# Altium PCB Jukebox PCB.PCBDOC (part 3 of 3)
Units mil, origin at the board's own origin, x right, y up, seen from the top; angles counter-clockwise.
Board outline 8310.03 x 5810.03 mil, 2 copper layers (Top Layer, Bottom Layer); 153 components, 235 nets, 1170 pads, 408 vias.
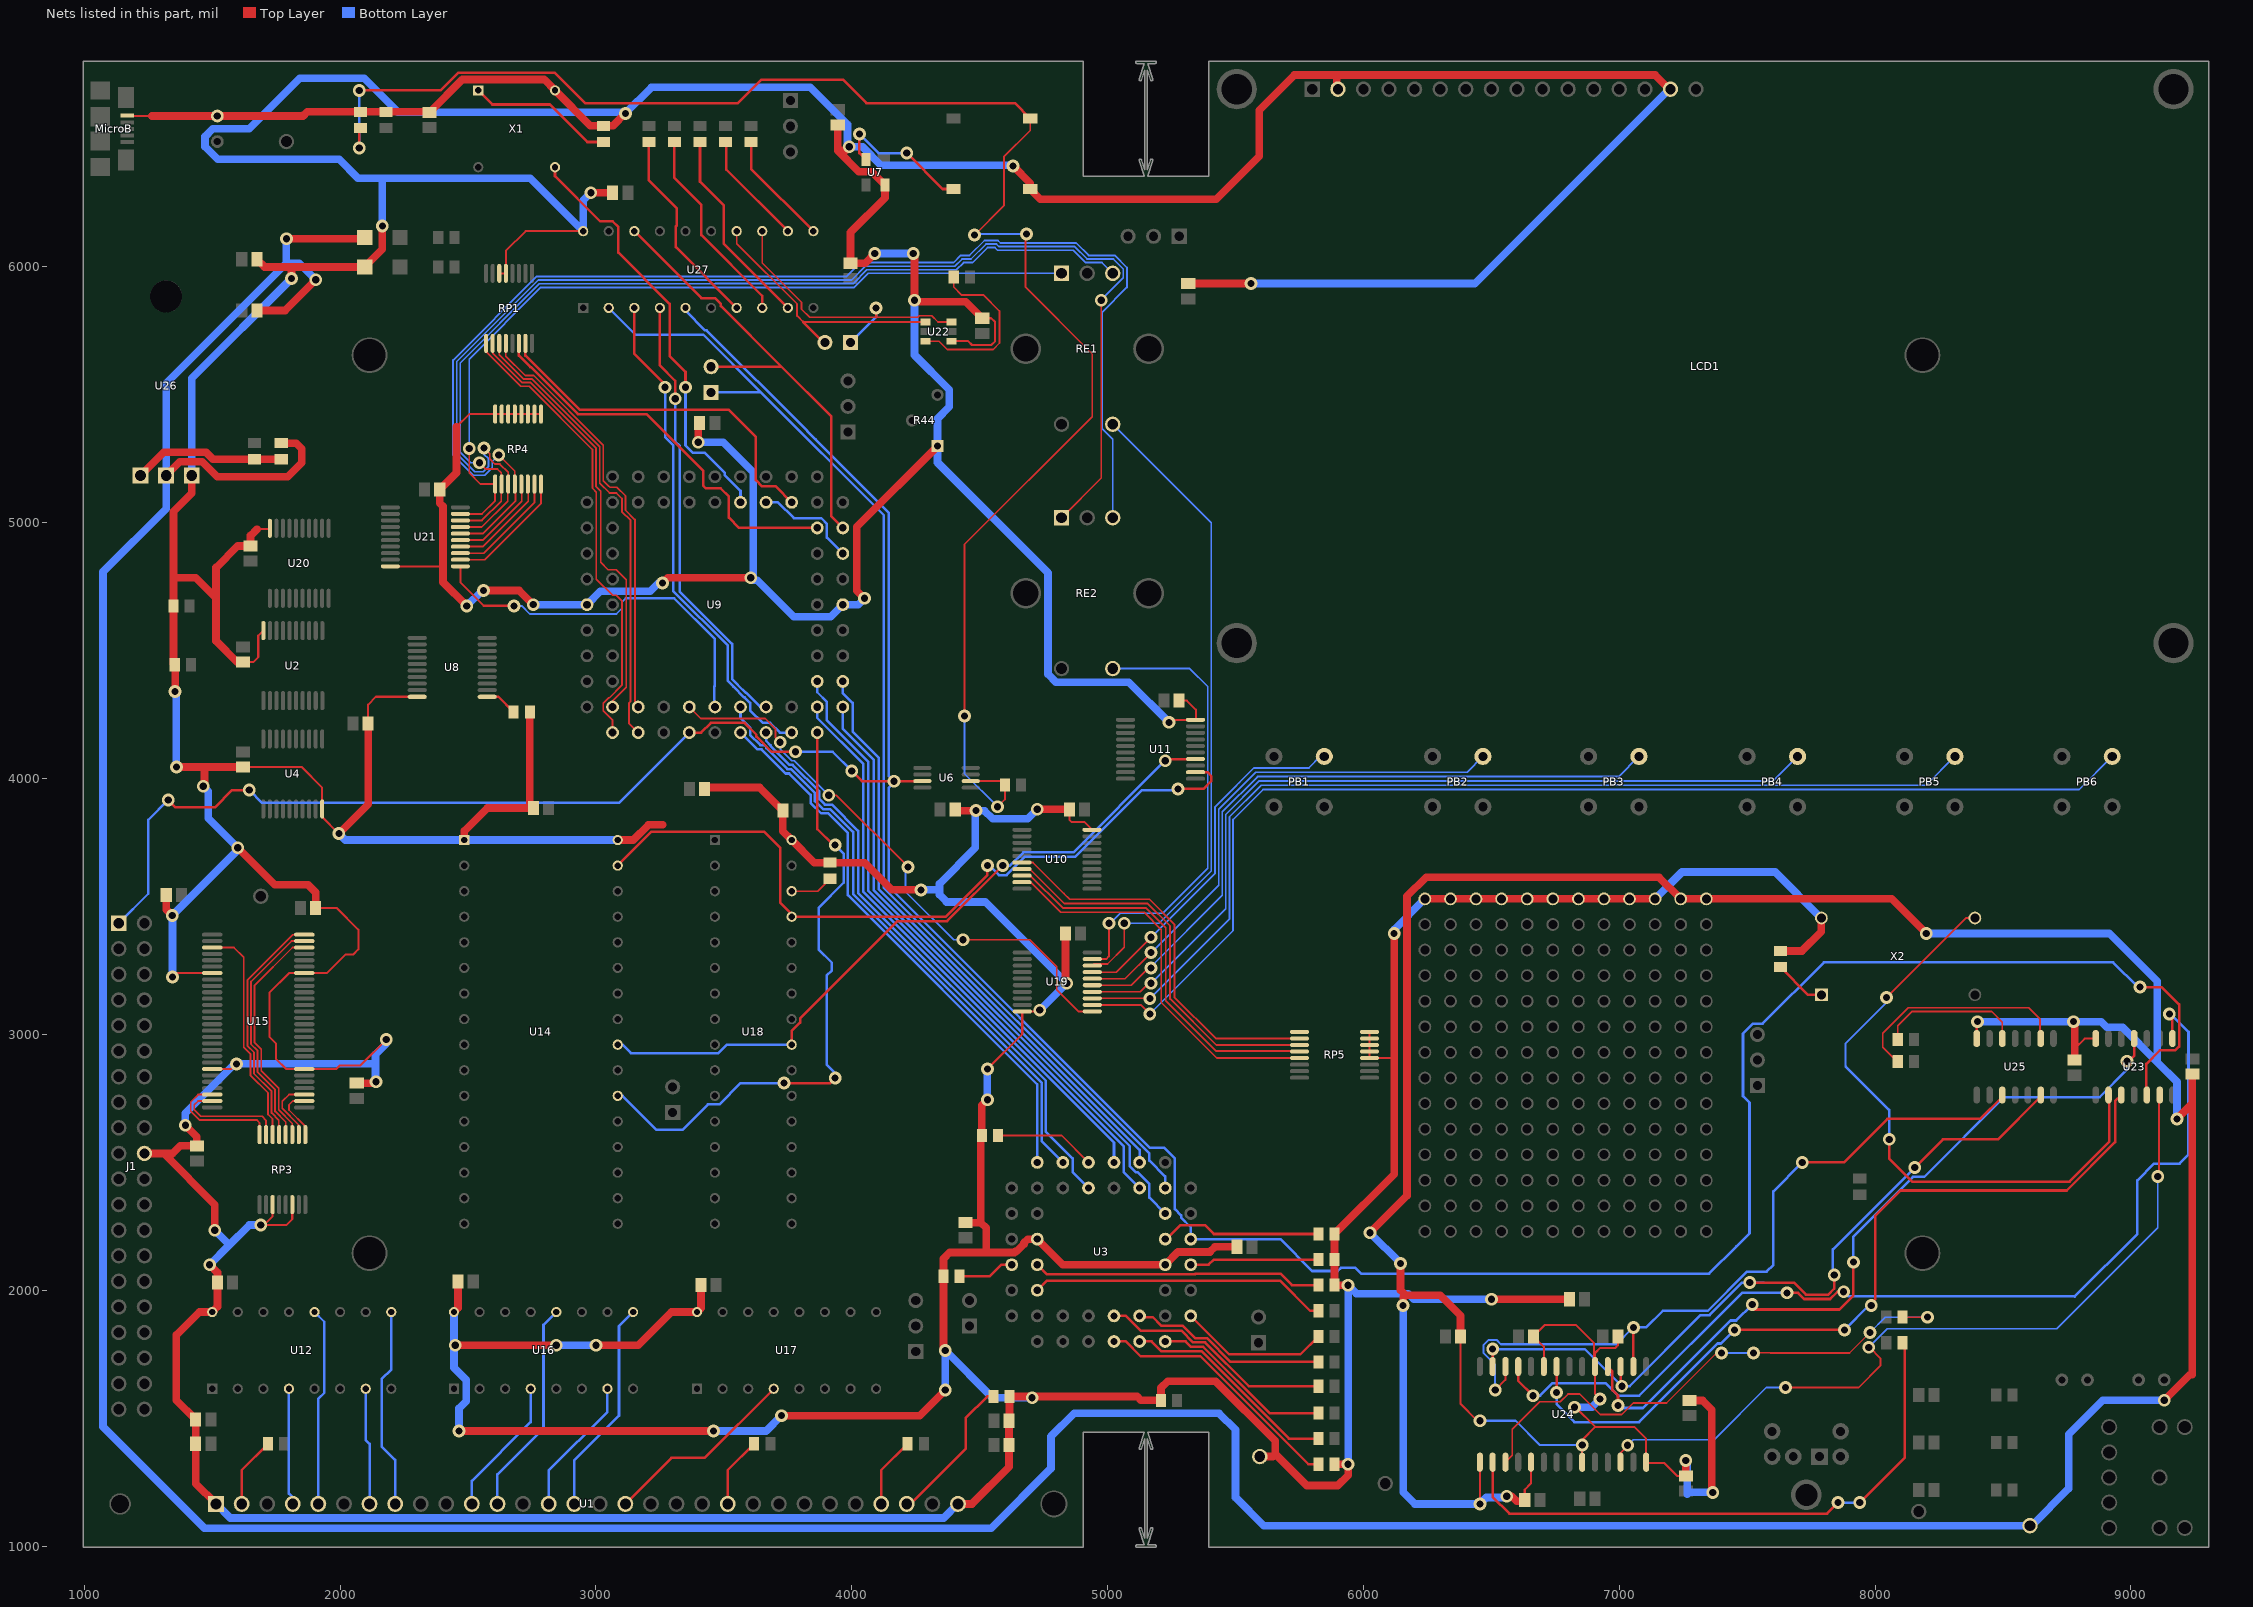
[diagram p3: the nets of this part, all layers, seen from the top]

## Via types
v1: diameter 50, hole 28, Top Layer to Bottom Layer, 408 vias

## Nets (pads, with @x,y where several pads share a name; then routed paths per layer and width w, separated by ;. In a path a pad name is that pad's centre, name@x,y a point inside that pad or via, vN(x,y) a via of type N, cw(c..) or ccw(c..) an arc to the next point about the centre after c; other vN are vias at no path point) (continued)
NetP9_1: P9.1 U3.41 U27.2 | length 4691.1
  Bottom Layer w10: U27.2@3050,5840 3155,5735 3420,5735 3645,5510 ; P9.1@3450,5510 3645,5510 ; U3.41@5225,2400 5225,2444.85 5162.9,2506.95 5162.9,2535.39 4125,3573.29 4125,5030 3645,5510
NetPB1_2: PB1.2 U19.7 | length 1408.6
  Top Layer w7: U19.7@4940,3243.54 5033.54,3243.54 v1(5170,3380)
  Bottom Layer w7: v1(5170,3380) 5420,3630 5420,3890 5494.5,3964.5 5494.7,3964.5 5515.5,3985.3 5515.5,3985.5 5571.99,4041.99 5786.99,4041.99 5831.85,4086.85 PB1.2@5846.85,4086.85
NetPB2_2: PB2.2 U19.6 | length 2060.1
  Top Layer w7: U19.6@4940,3217.95 5067.95,3217.95 v1(5170,3320)
  Bottom Layer w7: v1(5170,3320) 5434,3584 5434,3879.96 5579.03,4024.99 6404.99,4024.99 PB2.2@6466.85,4086.85
NetPB3_2: PB3.2 U19.5 | length 2701.8
  Top Layer w7: U19.5@4940,3192.36 5092.36,3192.36 5160,3260 v1(5170,3260)
  Bottom Layer w7: v1(5170,3260) 5170,3265.55 5448,3543.55 5448,3869.92 5586.07,4007.99 6997.99,4007.99 PB3.2@7076.85,4086.85
NetPB4_2: PB4.2 U19.4 | length 3353.5
  Top Layer w7: U19.4@4940,3166.77 5126.77,3166.77 5160,3200 v1(5170,3200)
  Bottom Layer w7: v1(5170,3200) 5462,3492 5462,3859.88 5593.11,3990.99 7600.99,3990.99 PB4.2@7696.85,4086.85
NetPB5_2: PB5.2 U19.3 | length 3998.2
  Top Layer w7: U19.3@4940,3141.18 5163.82,3141.18 v1(5165,3140)
  Bottom Layer w7: v1(5165,3140) 5476,3451 5476,3849.83 5600.15,3973.99 8198.99,3973.99 PB5.2@8311.85,4086.85
NetPB6_2: PB6.2 U19.2 | length 4673.3
  Top Layer w7: U19.2@4940,3115.59 5129.41,3115.59 v1(5165,3080)
  Bottom Layer w7: v1(5165,3080) 5490,3405 5490,3839.79 5607.19,3956.99 8796.99,3956.99 PB6.2@8926.85,4086.85
NetPB7_2: PB7.2 R1.2 R2.1 U6.2 | length 6704
  Top Layer w7: v1(4440,4245) 4440,4915 4940,5415 4940,5659.8 4679.5,5920.3 4679.5,6125.48 v1(4683.02,6129) ; U6.2@4465,3990.59 4582.91,3990.59 R2.1@4598.5,3975 4598.5,3918.5 v1(4570,3890) ; v1(4480,6125) 4594.5,6239.5 4594.5,6430.5 4697.44,6533.44 PB7.2@4697.44,6580.28
  Top Layer w10: v1(2075,6465) 2075,6538.5 R1.2@2080,6543.5 ; v1(2075,6690) 2393.05,6690 2462.95,6759.9 2837.53,6759.9 2957.43,6640 3555,6640 3647.43,6732.43 3965,6732.43 4057.43,6640 4637.72,6640 PB7.2@4697.44,6580.28
  Bottom Layer w7: v1(4440,4245) 4440,4020 v1(4570,3890) ; v1(4480,6125) 4484,6129 v1(4683.02,6129)
  Bottom Layer w10: v1(2075,6465) v1(2075,6690)
NetPB8_2: PB8.2 U7.2 | length 567.1
  Top Layer w10: v1(4030,6520) 4030,6445 U7.2@4055,6420 ; v1(4215,6445) 4355.28,6304.72 PB8.2@4397.56,6304.72
  Bottom Layer w10: v1(4030,6520) 4105,6445 v1(4215,6445)
NetR3_1: R3.1 U1.28 | length 582.8
  Top Layer w10: U1.28@4215,1165 4230,1165 4445,1380 4445,1500 4530,1585 R3.1@4553.5,1585
NetR5_2: R5.2 U3.13 | length 222.1
  Top Layer w10: R5.2@4421.5,2055 4540,2055 4585,2100 U3.13@4625,2100
NetR11_2: R11.2 U8.1 | length 128.4
  Top Layer w10: U8.1@2575,4320 2618.5,4320 R11.2@2678.5,4260
NetR12_2: R12.2 U24.16 | length 2316.7
  Top Layer w10: U24.16@6505,1327.99 6505,1192 6570,1127 7812,1127 v1(7855,1170) ; v1(7940,1170) 8115,1345 8115,1786.5 R12.2@8106.5,1795
  Bottom Layer w10: v1(7855,1170) v1(7940,1170)
NetR13_2: R13.2 U25.9 | length 887.5
  Top Layer w7: R13.2@8088.5,2895 8085,2895 8030,2950 8030,3005 8129,3104 8601,3104 8645,3060 8645,2986.14 U25.9@8647.2,2983.94
NetR14_2: R14.2 U3.33 | length 506.8
  Top Layer w10: U3.33@5325,2100 5395,2100 5415,2120 R14.2@5823.5,2120
NetR15_2: R15.2 U3.2 | length 397
  Top Layer w7: R15.2@4571.5,2605 4820,2605 U3.2@4925,2500
NetR16_2: R16.2 U3.36 | length 635.8
  Top Layer w10: U3.36@5225,2200 5230,2200 5285,2255 5380,2255 5415,2220 R16.2@5823.5,2220
NetR17_2: R17.2 U3.24 | length 997.3
  Top Layer w10: U3.24@5025,1800 5071.4,1800 5129.3,1742.1 5362.69,1742.1 5784.79,1320 R17.2@5823.5,1320
NetR19_2: R19.2 U3.14 | length 1134
  Top Layer w10: U3.14@4725,2100 4762.9,2062.1 5340.7,2062.1 5343.6,2065 5675,2065 5720,2020 R19.2@5823.5,2020
NetR26_1: R26.1 U22.6 | length 694.6
  Top Layer w7: U22.6@4288,5710 4340.88,5710 4373.38,5677.5 4552.25,5677.5 4577.5,5702.75 4577.5,5827.5 4515,5890 4430,5890 4398.5,5921.5 R26.1@4398.5,5960
NetR28_1: R28.1 U3.27 | length 773.1
  Top Layer w10: U3.27@5125,1900 5130,1895 5176.4,1895 5209.3,1862.1 5292.9,1862.1 5341.9,1813.1 5387.86,1813.1 5480.96,1720 R28.1@5823.5,1720
NetR29_1: R29.1 U3.25 | length 912.4
  Top Layer w10: U3.25@5025,1900 5071.4,1900 5129.3,1842.1 5287.9,1842.1 5333.9,1796.1 5380.82,1796.1 5551.92,1625 R29.1@5823.5,1625
NetR31_1: R31.1 U3.26 | length 855.9
  Top Layer w10: U3.26@5125,1800 5171.4,1800 5209.3,1762.1 5366.73,1762.1 5708.83,1420 R31.1@5823.5,1420
NetR32_1: R32.1 U3.29 | length 589.6
  Top Layer w10: U3.29@5325,1900 5475,1750 5753.5,1750 R32.1@5823.5,1820
NetR35_1: R35.1 U18.30 | length 170.1
  Top Layer w7: U18.30@3765,3560 3866.5,3560 R35.1@3915,3608.5
NetR45_1: R45.1 R54.1 U26.1 | length 599
  Top Layer w30: U26.1@1220,5185 1310.9,5275.9 1475.81,5275.9 1503.21,5248.5 R45.1@1665,5248.5 R54.1@1770,5248.5
NetR46_2: R46.2 X1.1 | length 573.5
  Top Layer w10: X1.1@2540,6690 2595,6635 2820,6635 2966.5,6488.5 R46.2@3030,6488.5
NetR47_2: R47.2 X2.1 | length 204.9
  Top Layer w10: R47.2@7630,3263.5 7738.5,3155 X2.1@7790,3155
NetR48_1: R48.1 U3.28 | length 714.5
  Top Layer w10: U3.28@5225,1800 5305,1800 5325.9,1779.1 5373.78,1779.1 5632.88,1520 R48.1@5823.5,1520
NetR49_2: R49.2 U24.17 | length 2110.1
  Top Layer w7: U24.17@6555,1327.99 6581.79,1354.78 6581.79,1457.3 6676.99,1552.5 6677.7,1552.5 6689.7,1564.5 6769.7,1564.5 6799.7,1594.5 6845.5,1594.5 6925.5,1514.5 7009.7,1514.5 7054.7,1559.5 7184.5,1559.5 7380,1755 v1(7400,1755) ; v1(7525,1755) 7525.5,1755.5 7589.7,1755.5 7590.2,1755 7900,1755 v1(7980,1835) ; R49.2@8106.5,1895 v1(8205,1895)
  Bottom Layer w7: v1(7400,1755) v1(7525,1755) ; v1(7980,1835) 8040,1895 v1(8205,1895)
NetR50_2: R50.2 U25.12 | length 566.9
  Top Layer w7: R50.2@8088.5,2980 8088.5,3033.5 8145,3090 8455,3090 8497.2,3047.8 U25.12@8497.2,2983.94
NetR55_1: R55.1 U3.16 | length 1163
  Top Layer w10: U3.16@4725,2000 4762.9,2037.9 5673.82,2037.9 5791.72,1920 R55.1@5823.5,1920
NetR57_1: R57.1 U1.27 | length 277.9
  Top Layer w10: U1.27@4115,1165 4115,1296.5 R57.1@4218.5,1400
NetR58_1: R58.1 U1.2 | length 277.9
  Top Layer w10: U1.2@1615,1165 1615,1296.5 R58.1@1718.5,1400
NetR59_1: R59.1 U1.21 | length 277.9
  Top Layer w10: U1.21@3515,1165 3515,1296.5 R59.1@3618.5,1400
NetR60_2: R60.2 U27.7 | length 793.1
  Top Layer w10: R60.2@3206.65,6488.5 3206.65,6338.35 3315,6230 3315,6161.5 3312.1,6158.6 3312.1,6077.9 U27.7@3550,5840
NetR61_2: R61.2 U27.8 | length 790.7
  Top Layer w10: R61.2@3306.65,6488.5 3306.65,6348.35 3412.1,6242.9 3412.1,6124.3 3650,5886.4 U27.8@3650,5840
NetR62_2: R62.2 U27.9 | length 790.7
  Top Layer w10: R62.2@3406.65,6488.5 3406.65,6333.35 3500,6240 3500,6090 U27.9@3750,5840
NetR63_1: R63.1 U27.12 | length 449.3
  Top Layer w10: R63.1@3506.65,6488.5 3510,6485.16 3510,6380 U27.12@3750,6140
NetR64_1: R64.1 U27.11 | length 449.3
  Top Layer w10: R64.1@3606.65,6488.5 3606.65,6383.35 U27.11@3850,6140
NetRE1_1: RE1.1 RP4.9 U21.9 | length 3241.5
  Top Layer w7: U21.9@2470,5034.72 2554.72,5034.72 2605.87,5085.87 RP4.9@2605.87,5151.38 2548.62,5151.38 2505,5195 v1(2505,5290) v1@2505.87,5289.13
  Bottom Layer w7: v1(2505,5290) 2505,5640 2785,5920 4010,5920 4065,5975 RE1.1@4820,5975
NetRE1_3: RE1.3 RP4.10 U21.8 | length 3642.5
  Top Layer w7: U21.8@2470,5009.13 2554.13,5009.13 2630,5085 2630,5195 2615,5210 2570,5210 v1(2545,5235) v1@2531.46,5221.46
  Bottom Layer w7: v1(2545,5235) 2509.8,5235 2469.5,5275.3 2469.5,5624.5 2779,5934 3465,5934 3466,5935 4005.2,5935 4059.2,5989 4409,5989 4437,6017 4471.8,6017 4530.3,6075.5 4559.7,6075.5 4569.7,6065.5 4865.56,6065.5 4914.06,6017 4978,6017 RE1.3@5020,5975
NetRE1_4: RE1.4 U19.8 | length 2578.7
  Top Layer w7: U19.8@4940,3269.13 4946.32,3275.45 4999.49,3275.45 5065,3340.96 v1(5065,3435)
  Bottom Layer w7: RE1.4@5020,5385 5405,5000 5405,3639.04 5200.96,3435 v1(5065,3435)
NetRE2_1: RE2.1 RP4.11 U21.7 | length 5002.9
  Top Layer w7: U21.7@2470,4983.54 2553.54,4983.54 2655,5085 RP4.11@2655,5149.33 ; v1@2562,5283 v1(2562,5292) 2584.5,5269.5 2584.5,5250.3 2605.3,5229.5 2624.5,5229.5 2657.05,5196.95 RP4.11@2657.05,5151.38 ; RE2.1@4820,5020 4975,5175 v1(4975,5870)
  Bottom Layer w7: v1(2562,5292) 2562,5268.2 2580.5,5249.7 2580.5,5220.3 2559.7,5199.5 2525.5,5199.5 2455.5,5269.5 2455.5,5630.3 2774.2,5949 3999.4,5949 4053.4,6003 4403.2,6003 4431.2,6031 4466,6031 4524.5,6089.5 4565.5,6089.5 4575.5,6079.5 4871.36,6079.5 4919.86,6031 5022.55,6031 5061.4,5992.15 5061.4,5957.85 4975,5871.45 v1(4975,5870)
NetRE2_3: RE2.3 RP4.12 U21.6 | length 5008.5
  Top Layer w7: U21.6@2470,4957.95 2557.95,4957.95 2685,5085 RP4.12@2685,5149.02 ; v1(2620,5265) 2682.64,5202.36 RP4.12@2682.64,5151.38
  Bottom Layer w7: v1(2620,5265) 2594.5,5239.5 2594.5,5214.5 2565.5,5185.5 2519.7,5185.5 2441.5,5263.7 2441.5,5636.1 2768.4,5963 3980,5963 4034,6017 4397.4,6017 4425.4,6045 4460.2,6045 4518.7,6103.5 4571.3,6103.5 4581.3,6093.5 4877.16,6093.5 4925.66,6045 5028.35,6045 5075.4,5997.95 5075.4,5920.2 4978.6,5823.4 4978.6,5367.85 5020,5326.45 RE2.3@5020,5020
NetRE2_4: RE2.4 U19.9 | length 1784.8
  Top Layer w7: U19.9@4940,3294.72 4994.72,3294.72 5005,3305 v1(5005,3435)
  Bottom Layer w7: v1(5005,3435) 5010.55,3435 5049.05,3473.5 5215.42,3473.5 5391,3649.08 5391,4360 5321,4430 RE2.4@5020,4430
NetRP1_9: RP1.9 U9.18 | length 1816.1
  Top Layer w7: RP1.9@2570.87,5701.38 2570.87,5669.13 2706.13,5533.87 2738.83,5533.87 2986.6,5286.1 2986.6,5134.8 3001.4,5120 3001.4,4780 3065,4716.4 3080.08,4716.4 3101.4,4695.08 3101.4,4364.92 3052.88,4316.4 3049.92,4316.4 3028.6,4295.08 3028.6,4264.92 3065,4228.52 U9.18@3065,4180
NetRP1_10: RP1.10 U9.19 | length 1698.2
  Top Layer w7: RP1.10@2596.46,5701.38 2596.46,5663.34 2711.93,5547.87 2744.63,5547.87 3000.6,5291.89 3000.6,5140.6 3018.4,5122.8 3018.4,4845 3047,4816.4 3080.08,4816.4 3118.4,4778.08 3118.4,4357.88 3065,4304.48 U9.19@3065,4280
NetRP1_11: RP1.11 U9.20 | length 1786.6
  Top Layer w7: RP1.11@2622.05,5701.38 2622.05,5657.55 2717.73,5561.87 2750.42,5561.87 3014.6,5297.69 3014.6,5155.27 3053.47,5116.4 3080.08,5116.4 3101.4,5095.08 3101.4,5043.8 3135.4,5009.8 3135.4,4301.88 3128.6,4295.08 3128.6,4216.4 U9.20@3165,4180
NetRP1_12: RP1.12 U9.21 | length 1670.6
  Top Layer w7: RP1.12@2647.64,5701.38 2647.64,5651.76 2723.53,5575.87 2756.22,5575.87 3028.6,5303.49 3028.6,5164.92 3049.92,5143.6 3050.31,5143.6 3054.89,5139.02 3081.49,5139.02 3115.4,5105.12 3115.4,5049.6 3152.4,5012.6 3152.4,4292.6 U9.21@3165,4280
NetRP1_14: RP1.14 U9.50 | length 1575.7
  Top Layer w10: RP1.14@2698.82,5701.38 2698.82,5653.64 2744.09,5608.37 2745.64,5608.37 2929.01,5425 3197.64,5425 3420,5202.64 3420,5144.04 3429.14,5134.9 3487.74,5134.9 3519.9,5102.74 3519.9,5020.1 3560,4980 U9.50@3865,4980
NetRP1_15: RP1.15 U9.55 | length 1424.7
  Top Layer w10: RP1.15@2724.41,5701.38 2724.41,5653.64 2936.05,5442 3518,5442 3625,5335 3625,5166.4 3649.3,5142.1 3702.9,5142.1 U9.55@3765,5080
NetRP3_9: RP3.9 U15.2 | length 209.2
  Top Layer w7: U15.2@1860,2740 1815,2740 1800,2725 1800,2704.6 1864.13,2640.46 RP3.9@1864.13,2608.62
NetRP3_10: RP3.10 U15.3 | length 253.9
  Top Layer w7: RP3.10@1838.54,2608.62 1838.54,2646.25 1774,2710.8 1774,2739 1800,2765 U15.3@1860,2765
NetRP3_11: RP3.11 U15.26 | length 899.9
  Top Layer w7: RP3.11@1812.95,2608.62 1812.95,2652.05 1760,2705 1760,2789.49 1691.5,2857.99 1691.5,2941.63 1665.6,2967.53 1665.6,3191.61 1813.99,3340 U15.26@1860,3340
NetRP3_12: RP3.12 U15.27 | length 928.2
  Top Layer w7: RP3.12@1787.36,2608.62 1787.36,2657.84 1746,2699.2 1746,2783.7 1677.5,2852.2 1677.5,2935.83 1651.6,2961.73 1651.6,3206.6 1810,3365 U15.27@1860,3365
NetRP3_13: RP3.13 U15.28 | length 951.2
  Top Layer w7: RP3.13@1761.77,2608.62 1760,2610.39 1760,2665.4 1732,2693.4 1732,2777.9 1663.5,2846.4 1663.5,2930.03 1637.6,2955.93 1637.6,3212.4 1815.2,3390 U15.28@1860,3390
NetRP3_14: RP3.14 U15.31 | length 879
  Top Layer w7: U15.31@1500,3340 1585,3340 1623.6,3301.4 1623.6,2950.13 1649.5,2924.23 1649.5,2840.6 1718,2772.1 1718,2687.6 1736.18,2669.42 RP3.14@1736.18,2608.62
NetRP3_15: RP3.15 U15.55 | length 449.4
  Top Layer w7: U15.55@1500,2740 1445,2740 1430,2725 1430,2705 1455,2680 1695,2680 1710,2665 1710,2609.21 RP3.15@1710.59,2608.62
NetRP3_16: RP3.16 U15.54 | length 466.6
  Top Layer w7: U15.54@1500,2765 1445,2765 1416,2736 1416,2699.2 1449,2666.2 1449,2666 1674,2666 1685,2655 RP3.16@1685,2608.62
NetRP4_13: RP4.13 U21.5 | length 367.8
  Top Layer w7: U21.5@2470,4932.36 2557.36,4932.36 2710,5085 RP4.13@2710,5149.61
NetRP4_14: RP4.14 U21.4 | length 404
  Top Layer w7: U21.4@2470,4906.77 2556.77,4906.77 2735,5085 RP4.14@2735,5150.2
NetRP4_15: RP4.15 U21.3 | length 443.1
  Top Layer w7: U21.3@2470,4881.18 2561.18,4881.18 2760,5080 RP4.15@2760,5150.79
NetRP4_16: RP4.16 U21.2 | length 482.3
  Top Layer w7: U21.2@2470,4855.59 2565.59,4855.59 2785,5075 RP4.16@2785,5151.38
NetU1_4: U1.4 U12.4 | length 456.2
  Bottom Layer w10: U12.4@1800,1615 1800,1205 1815,1190 U1.4@1815,1165
NetU1_5: U1.5 U12.12 | length 775.2
  Bottom Layer w10: U12.12@1900,1915 1937.9,1877.1 1937.9,1599.3 1915,1576.4 U1.5@1915,1165
NetU1_7: U1.7 U12.7 | length 456.2
  Bottom Layer w10: U12.7@2100,1615 2100,1415 2115,1400 U1.7@2115,1165
NetU1_8: U1.8 U12.9 | length 787.6
  Bottom Layer w10: U12.9@2200,1915 2200,1690.8 2162.1,1652.9 2162.1,1389.72 2215,1336.82 U1.8@2215,1165
NetU1_11: U1.11 U16.4 | length 545.3
  Bottom Layer w10: U1.11@2515,1165 2515,1255 2745,1485 U16.4@2745,1615
NetU1_12: U1.12 U16.12 | length 845.3
  Bottom Layer w10: U1.12@2615,1165 2615,1280 2795,1460 2795,1865 U16.12@2845,1915
NetU1_14: U1.14 U16.7 | length 545.3
  Bottom Layer w10: U1.14@2815,1165 2815,1295 3045,1525 U16.7@3045,1615
NetU1_15: U1.15 U16.9 | length 845.3
  Bottom Layer w10: U1.15@2915,1165 2915,1335 3090,1510 3090,1860 U16.9@3145,1915
NetU1_17: U1.17 U17.4 | length 766.4
  Top Layer w10: U1.17@3115,1165 3295,1345 3425,1345 U17.4@3695,1615
NetU3_3: U3.3 U9.30 | length 2326
  Bottom Layer w10: U9.30@3665,4180 3665,4148.08 3683,4130.08 3683,4126.67 3755.67,4054 3769.08,4054 3873,3950.08 3873,3919.67 3894.67,3898 3922.41,3898 4025,3795.41 4025,3553.08 4759,2819.08 4759,2619.6 4862.9,2515.7 4862.9,2462.1 U3.3@4925,2400
NetU3_4: U3.4 U9.29 | length 2335.2
  Bottom Layer w10: U9.29@3565,4280 3565,4237.57 3602.9,4199.67 3602.9,4170.38 3642.28,4131 3658.04,4131 3666,4123.04 3666,4119.63 3748.63,4037 3762.04,4037 3856,3943.04 3856,3912.63 3887.63,3881 3915.37,3881 4005,3791.37 4005,3549.04 4742,2812.04 4742,2583 U3.4@4825,2500
NetU3_6: U3.6 U9.28 | length 2194.3
  Bottom Layer w10: U9.28@3565,4180 3631,4114 3647.59,4114 3741.59,4020 3755,4020 3839,3936 3839,3905.59 3880.59,3864 3908.33,3864 3985,3787.33 3985,3545 4725,2805 U3.6@4725,2500
NetU3_38: U3.38 U9.35 | length 2506.1
  Bottom Layer w10: U9.35@3965,4280 3965,4194.14 4085,4074.14 4085,3565.21 5087.1,2563.11 5087.1,2484.3 5109.3,2462.1 5116.5,2462.1 5162.9,2415.7 5162.9,2362.1 U3.38@5225,2300
NetU3_42: U3.42 U9.37 | length 2360.5
  Bottom Layer w10: U9.37@3965,4380 3965,4333.6 4002.9,4295.7 4002.9,4184.53 4105,4082.43 4105,3569.25 5125,2549.25 U3.42@5125,2500
NetU3_43: U3.43 U9.38 | length 2501.9
  Bottom Layer w10: U9.38@3865,4380 3865,4337.57 3902.9,4299.67 3902.9,4227.96 4065,4065.86 4065,3561.17 5062.9,2563.27 5062.9,2462.1 U3.43@5125,2400
NetU3_44: U3.44 U9.36 | length 2260.5
  Bottom Layer w10: U9.36@3865,4280 3865,4237.57 4045,4057.57 4045,3557.12 5025,2577.12 U3.44@5025,2500
NetU9_31: U9.31 U27.4 | length 1746
  Top Layer w10: U27.4@3250,5840 3250,5615 3310,5555 v1(3310,5485)
  Bottom Layer w10: v1(3310,5485) 3310,5318.63 3327.1,5301.53 3327.1,4731.94 3532.33,4526.72 3532.33,4389.04 3554,4367.37 3554,4366.96 3586.06,4334.9 3587.74,4334.9 3642.64,4280 U9.31@3665,4280
NetU9_32: U9.32 U27.3 | length 1959.7
  Top Layer w10: U27.3@3150,5840 3150,5660 3270,5540 v1(3270,5530)
  Bottom Layer w10: v1(3270,5530) 3270,5334.59 3302.9,5301.69 3302.9,4732.1 3515.33,4519.67 3515.33,4382 3537,4360.33 3537,4359.92 3579.02,4317.9 3580.7,4317.9 3602.9,4295.7 3602.9,4267.1 3652.1,4217.9 3680.7,4217.9 3718.6,4180 U9.32@3765,4180
NetU9_47: U9.47 U9.57 | length 414.2
  Bottom Layer w10: U9.57@3665,5080 3711.4,5080 3773.5,5017.9 3880.7,5017.9 3902.9,4995.7 3902.9,4942.1 U9.47@3965,4880
NetU9_59: U9.59 X1.3 | length 1665.9
  Top Layer w10: X1.3@2840,6390 2840,6354.64 3016.74,6177.9 3065.7,6177.9 3087.9,6155.7 3087.9,6055.7 3287.9,5855.7 3287.9,5652.1 3350,5590 v1(3350,5530)
  Bottom Layer w10: v1(3350,5530) 3350,5302.67 3379.67,5273 3425.6,5273 3502.9,5195.7 3502.9,5187.1 3565,5125 U9.59@3565,5080
NetU23_2: U23.2 X2.3 | length 2391.8
  Top Layer w8: v1(8045,3145) 8355,3455 X2.3@8390,3455 ; U23.2@8912.2,2757.87 U23.2@8912.2,2763.46
  Top Layer w10: v1(8055,2590) 8055,2515 8145,2425 8760,2425 8915,2580 8915,2760.67 U23.2@8912.2,2763.46
  Bottom Layer w8: 7885,2875 7885,2965.28 8045,3125.28 v1(8045,3145)
  Bottom Layer w10: 7885,2875 8055,2705 v1(8055,2590)
NetU23_3: U23.3 U24.8 | length 3202.9
  Top Layer w10: v1(6755,1600) U24.8@6755,1702.01 ; v1(7450,1845) v1(7880,1845) ; v1(7985,1940) 7985,1950 8000,1965 8000,2290 8100,2390 8749.04,2390 8937.9,2578.86 8937.9,2739.16 U23.3@8962.2,2763.46
  Bottom Layer w10: v1(6755,1600) 6755,1555 6825,1485 7077.67,1485 7384.67,1792 7397,1792 v1(7450,1845) ; v1(7880,1845) 7975,1940 v1(7985,1940)
NetU23_6: U23.6 U24.26 | length 3132.3
  Top Layer w7: U24.26@7005,1327.99 7005,1365 7032.69,1392.69 v1(7032.69,1394.5) ; v1(7650,1620) 7935.2,1620 8020.5,1705.3 8020.5,1734.7 7978.2,1777 v1(7975,1777) ; v1(9105,2445) 9110,2450 U23.6@9110,2761.26
  Top Layer w10: U23.6@9110,2761.26 U23.6@9112.2,2763.46
  Bottom Layer w7: v1(7032.69,1394.5) 7054.19,1416 7370.8,1416 7574.8,1620 v1(7650,1620) ; v1(7975,1777) 8048,1850 8710,1850 9105,2245 v1(9105,2445)
NetU23_8: U23.8 U24.11 | length 3980
  Top Layer w10: U24.11@6605,1702.01 6605,1646 v1(6663,1588) ; v1(7655,1990) 7698.63,1990 7722.63,1966 7824.04,1966 7852.37,1994.33 v1(7877,1994.33) ; v1(9150,3080) 9162.2,3067.8 U23.8@9162.2,2983.94
  Bottom Layer w10: v1@6660,1585 v1(6663,1588) 6690.67,1588 6739.67,1637 6945.67,1637 6994.67,1588 7078,1588 7480,1990 v1(7655,1990) ; v1@7876.33,1995 v1(7877,1994.33) 7894.33,1977 8778,1977 8780,1975 9025,2220 9025,2430 9090,2495 9190,2495 9225,2530 9225,3010 9155,3080 v1(9150,3080)
NetU23_11: U23.11 U24.4 | length 3005.2
  Top Layer w10: U24.4@6953.89,1700.9 6973,1681.79 6973,1609.67 6994.67,1588 6995,1588 v1(6995,1550) ; v1(7520,1945) 7520,1925 7860,1925 7915,1980 v1(7915,2110) ; v1(8985,2895) 8990.88,2895 9012.2,2916.33 U23.11@9012.2,2983.94
  Bottom Layer w10: v1@6995,1540 7092.67,1540 7434.67,1882 7457,1882 v1(7520,1945) ; v1(7915,2110) 7915,2210 8148,2443 8192,2443 8504.33,2755.33 8878,2755.33 8985,2862.33 v1(8985,2895)
NetU24_2: U24.2 U24.12 U25.3 | length 3075.6
  Top Layer w8: v1(6515,1610) 6555,1650 U24.12@6555,1702.01
  Top Layer w10: U24.2@7055,1702.01 v1(7055,1855) ; v1(7715,2500) 7877.67,2500 8047.67,2670 8410.75,2670 8497.2,2756.46 U25.3@8497.2,2763.46
  Bottom Layer w8: v1(6515,1610) 6515,1709.09 6469,1755.09 6469,1784.91 6490.09,1806 6519.91,1806 6536.91,1789 6989,1789 v1(7055,1855)
  Bottom Layer w10: v1(7055,1855) 7105,1855 7170,1920 7345.96,1920 7498.96,2073 7575.33,2073 7602,2099.67 7602,2387 v1(7715,2500)
NetU24_3: U24.3 U24.13 U25.6 | length 3014.2
  Top Layer w10: U24.13@6505,1702.01 v1(6505,1770) ; U24.3@7005,1702.01 7005,1630 v1(7010,1625) ; v1(7510,2030) 7682.67,2030 7729.67,1983 7817,1983 7840,2006 v1(7840,2060) ; v1(8155,2480) 8265,2590 8480.75,2590 8647.2,2756.46 U25.6@8647.2,2763.46
  Bottom Layer w10: v1(6505,1770) 6865,1770 v1(7010,1625) 7040,1625 7318,1903 7353,1903 7480,2030 7565,2030 ; v1@7835,2060 7835,2160 v1(8155,2480)
PCS0: U9.25 U19.1 | length 2227.6
  Top Layer w7: U9.25@3365,4280 3410,4235 3661.48,4235 3701.4,4195.08 3701.4,4160.6 v1(3720,4142) ; v1(3910,3935) 3940,3935 v1(4220,3655) ; v1(4435,3370) 4695,3370 4801,3264 4801,3174 4885,3090 U19.1@4940,3090
  Bottom Layer w7: v1(3720,4142) 3720,4114.8 3765.3,4069.5 3775.5,4069.5 v1(3910,3935) ; v1(4220,3655) 4210,3645 4210,3558.29 4398.29,3370 v1(4435,3370)
PCS1: U9.27 U21.1 | length 1482.2
  Top Layer w7: U21.1@2470,4830 2470,4767 2562,4675
  Top Layer w10: 2562,4675 v1(2680,4675)
  Bottom Layer w7: v1(2680,4675) 2709.8,4675 2741.2,4643.6 3080.08,4643.6 3101.4,4664.92 3101.4,4690 3116.4,4705
  Bottom Layer w10: 3116.4,4705 3305,4705 3465,4545 3465,4362.33 3463,4360.33 3463,4282 U9.27@3465,4280
POT_CS: P5.2 U22.4 U27.14 | length 1058.8
  Top Layer w7: U27.14@3550,6140 3550,6091.48 3786.4,5855.08 3786.4,5808.6 3810,5785 U22.4@4288,5785
  Top Layer w10: 3810,5785 3890,5705 P5.2@3895,5705
POT_UD: P5.1 U22.3 U27.13 | length 1193.4
  Top Layer w7: U27.13@3650,6140 3650,6015.52 3803.4,5862.12 3803.4,5835.12 3834.92,5803.6 4095,5803.6 4257.48,5803.6 4263.28,5809.4 4312.72,5809.4 4337.12,5785 U22.3@4390,5785
  Top Layer w10: 4095,5803.6 v1(4095,5840)
  Bottom Layer w10: P5.1@3995,5705 4095,5805 v1(4095,5840)
RD: U11.14 U14.24 U18.24 | length 2789.3
  Top Layer w10: U18.24@3765,2960 3765,3013.47 3797.9,3046.37 3797.9,3062.9 4178,3443 4373,3443 v1(4590,3660) ; v1(5225,4070) 5231.46,4076.46 U11.14@5343.62,4076.46
  Bottom Layer w10: U14.24@3085,2960 3103.24,2960 3136.14,2927.1 3478.63,2927.1 3511.53,2960 U18.24@3765,2960 ; v1(4590,3660) 4618.28,3660 4670.28,3712 4867,3712 v1(5225,4070)
RESET: J1.1 U3.35 U6.7 U9.24 U23.5 U27.5 | length 13746.9
  Top Layer w10: v1(1328,3917) 1357,3888 1510.04,3888 1577.04,3955 v1(1645,3955) ; U9.24@3365,4180 3411.4,4180 3449.3,4217.9 3580.7,4217.9 3627.1,4171.5 3627.1,4164.3 3686.4,4105 v1(3780,4105) ; v1(4000,4030) 4040,3990 v1(4165,3990) 4275.43,3990 U6.7@4276.02,3990.59 ; v1(9035,3185) 9120,3185 9187.9,3117.1 9187.9,2952.63 9172.85,2937.57 9112.57,2937.57 9060,2885 9060,2765.67 U23.5@9062.2,2763.46
  Bottom Layer w10: J1.1@1135,3435 1250,3550 1250,3839 v1(1328,3917) ; v1(1645,3955) 1695,3905 3090,3905 U9.24@3365,4180 ; U27.5@3350,5840 3350,5829.04 3427.04,5752 3432.04,5752 3826,5358.04 3826,5357.63 3857.63,5326 3858.04,5326 4145,5039.04 4145,4010 v1(4165,3990) 4165,3985 4145,3965 4145,3577.33 5164.43,2557.9 5220.7,2557.9 5262.9,2515.7 5262.9,2317.1 5287.1,2292.9 5287.1,2284.3 5325,2246.4 U3.35@5325,2200 5675,2200 5799.5,2075.5 5899.33,2075.5 5911.83,2088 5968.17,2088 5990.67,2065.5 7351.45,2065.5 7457.95,2172 7458.16,2172 7509,2222.84 7509,2733.9 7483.57,2759.33 7483.57,3003.57 7522.43,3042.43 7560.51,3042.43 7799.98,3281.9 8930.43,3281.9 9027.33,3185 v1(9035,3185) ; v1(3780,4105) 3925,4105 v1(4000,4030)
RP1: RP5.2 U10.6 | length 1536.9
  Top Layer w7: U10.6@4665,3672.05 4707.95,3672.05 4829.5,3550.5 4829.5,3550.3 4851.3,3528.5 5163.62,3528.5 5261,3431.12 5261,3146.12 5422.71,2984.41 RP5.2@5750,2984.41
RP2: RP5.3 U10.7 | length 1536.8
  Top Layer w7: U10.7@4665,3646.46 4696.63,3646.46 4831.58,3511.5 5156.58,3511.5 5244,3424.08 5244,3139.08 5424.26,2958.82 RP5.3@5750,2958.82
RP3: RP5.4 U10.8 | length 1536.8
  Top Layer w7: U10.8@4665,3620.87 4698.17,3620.87 4824.54,3494.5 5149.54,3494.5 5227,3417.04 5227,3132.04 5424.04,2935 5748.23,2935 RP5.4@5750,2933.23
RP4: RP5.5 U10.9 | length 1536.9
  Top Layer w7: U10.9@4665,3595.28 4699.72,3595.28 4817.5,3477.5 5142.5,3477.5 5210,3410 5210,3125 5427.5,2907.5 5427.64,2907.64 RP5.5@5750,2907.64
RP5: RP5.1
SRDY: P9.2 U9.49 U27.18 | length 1804
  Top Layer w10: U27.18@3150,6140 3412.1,5877.9 3465.7,5877.9 3487.9,5855.7 3487.9,5847.1 3725,5610 ; P9.2@3450,5610 3725,5610 ; U9.49@3965,4980 3920,5025 3920,5415 3725,5610
UCS: U9.34 U14.22 | length 2478.5
  Top Layer w10: v1(3735,2810) 3915,2810 v1(3935,2830) ; U9.34@3865,4180 3865,3802.67 3927.67,3740 v1(3935,3740)
  Bottom Layer w10: U14.22@3085,2760 3103.65,2760 3236.65,2627 3337.39,2627 3437.49,2727.1 3482.46,2727.1 3565.36,2810 v1(3735,2810) ; v1(3935,2830) 3945,2840 3902,2883 3902,3229.67 3922,3249.67 3922,3280.33 3870,3332.33 3870,3495 3968,3593 3968,3707 v1(3935,3740)
V3.3: C33.2 C34.2 C35.2 C36.2 C37.2 C38.2 C39.2 C41.2 C51.1 LED2.1 pad. pad.39@7240,3530 pad.39@7340,3530 R54.2 U23.14 U24.5 U24.9 U24.15 U24.19 U24.23 U24.28 U25.14 U26.2 | length 28593.1
  Top Layer w8: C41.2@6379.53,1820 6379.53,1555.47 6445,1490 v1(6455,1490) ; v1(6455,1165) U24.15@6455,1327.99 ; C36.2@6630.47,1180 6630.47,1220.47 6655,1245 U24.19@6655,1327.99 ; U24.9@6705,1702.01 6705,1779.53 C37.2@6664.53,1820 6709.53,1865 6830,1865 6901.92,1793.08 6901.92,1705.09 U24.5@6905,1702.01 ; v1(6825,1543) 6829,1543 6906,1466 ; U24.23@6855,1327.99 v1(6855,1395) 6855,1415 6906,1466 ; v1(6925,1575) 6905,1595 U24.5@6905,1702.01 ; C38.2@6994.53,1820 6994.53,1784.53 6985,1775 6925,1775 6905,1755 U24.5@6905,1702.01 ; C35.2@7260,1274.53 7225.47,1274.53 7175,1325 7107.99,1325 U24.28@7105,1327.99 7105,1420 7059,1466 6906,1466 ; U25.14@8397.2,2983.94 8397.2,3047.2 v1(8400,3050) ; 8780,2945 8818.94,2983.94 U23.14@8862.2,2983.94
  Top Layer w30: U26.2@1320,5185 1373.9,5238.9 1460.49,5238.9 1519.39,5180 1795,5180 1850,5235 1850,5290 1828.5,5311.5 R54.2@1770,5311.5 ; C51.1@1674.53,5830 1785,5830 v1(1905,5950) ; v1(1790,6110) 2081.1,6110 2086.1,6105 LED2.1@2096.1,6115 ; v1(6025,2225) 6170,2370 6170,3540 6245,3615 7155,3615 pad.39@7240,3530 pad.39@7340,3530 8065,3530 v1(8200,3395) ; v1(6145,2105) 6145,2000 6165,1980 6300,1980 6379.53,1900.47 C41.2@6379.53,1820 ; v1(6155,1940) 6155,1975 ; v1(6560,1195) 6580,1195 6600,1175 6625.47,1175 C36.2@6630.47,1180 ; C35.2@7260,1274.53 v1(7260,1335) ; C39.2@7275,1569.53 7324.53,1569.53 7325,1570 7362,1533 v1@7362,1219.67 ; v1(8775,3050) 8780,3045 8780,2945 C34.2@8780,2899.53 ; v1(9130,1570) 9230,1670 ; v1(9180,2670) 9240,2730 ; 9240,1670 9240,2730 ; C33.2@9240,2845.47 9240,2730
  Bottom Layer w8: v1(6455,1490) 6595,1490 6690,1395 v1(6855,1395)
  Bottom Layer w30: v1(1790,6110) 1790,6015 ; v1(1905,5950) 1840,6015 1790,6015 ; v1(6025,2225) v1(6145,2105) ; v1(6155,1940) 6155,1210 6200,1165 v1(6455,1165) 6480,1190 6555,1190 v1(6560,1195) ; v1(6825,1543) 6893,1543 v1(6925,1575) ; v1(7260,1335) 7265,1330 7265,1203.27 7271.73,1210 v1(7365,1210) ; v1@8200,3394.9 8915.61,3394.9 9103,3207.51 9103,2892 ; v1(8400,3050) v1(8775,3050) 8883.53,3050 8905.53,3028 8967,3028 9103,2892 ; v1(9130,1570) 8890,1570 8757,1437 8757,1225.53 8611.47,1080 5610,1080 5500,1190 5500,1455 5435,1520 4870,1520 4778.66,1428.66 4778.66,1303.66 4545,1070 1470,1070 1073,1467 1073,4808 1320,5055 U26.2@1320,5185 1320,5545 1790,6015 ; v1(9180,2670) 9180,2815 9103,2892
VCC: C0.1 C1.1 C2.2 C3.1 C4.2 C5.2 C6.2 C7.2 C8.2 C9.2 C10.2 C11.2 C12.2 C13.2 C14.2 C15.2 C16.2 C17.2 C18.2 C19.2 C20.2 C21.2 C22.2 C23.2 C24.2 C25.2 C26.2 C27.2 C28.2 C29.2 C30.2 C31.2 C32.2 C40.2 C50.1 J1.20 LCD1.2 LCD1.15 LED1.1 MicroB.1 pad.0@5595,1350 pad.39@6240,3530 pad.39@6340,3530 pad.39@6440,3530 pad.39@6540,3530 pad.39@6640,3530 pad.39@6740,3530 pad.39@6840,3530 pad.39@6940,3530 pad.39@7040,3530 pad.39@7140,3530 PB7.1 R1.1 R3.2 R5.1 R8.2 R11.1 R14.1 R15.1 R16.1 R17.1 R19.1 R23.2 R24.1 R30.2 R35.2 R44.1 R46.1 R47.1 RP1.5 RP1.6 RP3.3 RP3.6 RP4.1 RP4.2 RP4.3 RP4.4 RP4.5 RP4.6 RP4.7 RP4.8 RP5.12 RP5.13 RP5.14 RP5.15 RP5.16 U1.1 U1.30 U2.20 U3.12 U3.34 U4.20 U7.4 U8.20 U9.9 U9.43 U10.20 U11.20 U12.16 U14.1 U14.32 U15.7 U15.22 U15.35 U15.50 U16.16 U17.16 U18.32 U19.20 U20.20 U21.20 U22.1 U26.3 U27.20 X1.4 X2.4 | length 57296.2
  Top Layer w8: MicroB.1@1167.72,6591.14 1168.86,6590 1265,6590 ; v1(1345,3225) 1360,3240 U15.35@1500,3240 ; U15.50@1500,2865 1575,2865 v1(1595,2885) ; C24.2@1620,4045.47 1620.53,4046 1849,4046 1930,3965 U4.20@1930,3881.38 1930,3850 v1(1995,3785) ; C25.2@1620,4455.47 1660.47,4455.47 1680,4475 1680,4558.62 U2.20@1700,4578.62 ; 1675,4975 1721.38,4975 U20.20@1725,4978.62 ; v1(1690,2255) v1@1701.18,2255 ; RP3.3@1736.18,2335 1736.18,2290 v1@1701.18,2255 ; RP3.6@1812.95,2335 1812.95,2277.95 1790,2255 v1@1701.18,2255 ; C15.2@1904.53,3495 1985.91,3495 2071.5,3409.41 2071.5,3333.09 2050.41,3312 2020.59,3312 2020.3,3312.29 1948.01,3240 U15.22@1860,3240 1800,3240 1723.1,3163.1 1723.1,2991.35 1749,2965.45 1749,2905 1789,2865 U15.7@1860,2865 1985.51,2865 1999.01,2878.5 2078.5,2878.5 v1(2180.1,2980.1) v1@2169.9,2980.1 ; C8.2@2109.53,4215 2109.53,4289.53 2140,4320 U8.20@2301.38,4320 ; U21.20@2196.38,4830 2402,4830 ; 2455,5375 2505,5425 RP4.8@2605.87,5425 RP4.7@2631.46,5425 RP4.6@2657.05,5425 RP4.5@2682.64,5425 RP4.4@2708.23,5425 RP4.3@2733.82,5425 RP4.2@2759.41,5425 RP4.1@2785,5425 ; RP1.6@2622.05,5975 RP1.5@2647.64,5975 2647.64,6062.64 2725,6140 U27.20@2950,6140 ; U22.1@4390,5710 4455,5710 4470,5695 4545,5695 4560,5710 4560,5785 4545,5800 4544.53,5799.53 C22.2@4510,5799.53 ; v1(4530,2865) 4666.38,3001.38 U19.20@4666.38,3090 4729.5,3090 v1(4734.5,3095) ; C10.2@4850.47,3880 4850.47,3839.53 4860,3830 4910,3830 4938.62,3801.38 U10.20@4938.62,3800 ; v1(5240,4220) 5250,4230 U11.20@5343.62,4230 5345,4231.38 5345,4270 5310,4305 C11.2@5279.53,4305 ; RP5.16@6023.62,3010 RP5.15@6023.62,2984.41 RP5.14@6023.62,2958.82 RP5.13@6023.62,2933.23 RP5.12@6023.62,2907.64 6120,2907.64
  Top Layer w30: J1.20@1235,2535 1310,2535 ; 1265,6590 C0.1@1520,6590 1855,6590 1871.5,6606.5 R1.1@2080,6606.5 R8.2@2180,6606.5 2348.03,6606.5 C29.2@2350,6604.53 2478.37,6732.9 2797.1,6732.9 X1.4@2840,6690 2978.5,6551.5 R46.1@3030,6551.5 3066.5,6551.5 v1(3115,6600) ; C27.2@1320.47,3545 1320.47,3488.53 v1(1344,3465) ; v1(1355,4340) 1355,4443.5 R30.2@1353.5,4445 1348.5,4450 R23.2@1348.5,4675 1348.5,4785 ; v1(1360,4045) 1360.47,4045.47 1470,4045.47 ; v1(1395,2645) 1440,2600 C23.2@1440,2564.53 1374.53,2564.53 1345,2535 1310,2535 ; U26.3@1420,5185 1420,5115 1348.5,5043.5 1348.5,4785 ; v1(1465,3970) 1470,3975 1470,4045.47 ; v1(1490,2100) 1520.47,2069.53 1520.47,1935.47 U12.16@1500,1915 1450,1915 1360,1825 1360,1570.47 C2.2@1435.47,1495 C1.1@1435.47,1400 1435.47,1244.53 U1.1@1515,1165 ; v1(1510,2235) 1510,2335 1310,2535 ; v1(1600,3730) 1744.53,3585.47 1874.53,3585.47 1905,3555 1905,3495.47 C15.2@1904.53,3495 ; C24.2@1620,4045.47 1470,4045.47 ; C25.2@1620,4455.47 1597.46,4455.47 1515,4537.93 1515,4705 ; C50.1@1674.53,6030 1704.53,6000 1810,6000 ; 1675,4975 1650,4950 C20.2@1650,4909.53 1599.53,4909.53 1515,4825 1515,4705 ; v1(1810,5955) 1810,6000 ; v1(1995,3785) 2109.53,3899.53 C8.2@2109.53,4215 ; C28.2@2065,2809.53 2134.53,2809.53 v1(2140,2815) ; v1(2165,6160) 2165,6068.9 LED1.1@2096.1,6000 1810,6000 ; U16.16@2445,1915 2460.47,1930.47 2460.47,2005 ; v1(2450,1785) v1(2845,1785) ; 2455,5375 2455,5195.47 C21.2@2389.53,5130 2389.53,5076.94 2402,5064.47 2402,4830 2402,4768 v1(2495,4675) ; v1(2465,1450) v1(3460,1450) ; U14.1@2485,3760 2485,3795 2575,3885 C14.2@2755.47,3885 2741.5,3898.98 R11.1@2741.5,4260 ; v1(2560,4735) 2700,4735 v1(2755,4680) ; v1(2980,6290) C5.2@3065.47,6290 ; v1(3000,1785) 3165,1785 3295,1915 U17.16@3395,1915 3410.47,1930.47 C17.2@3410.47,2005 ; U14.32@3085,3760 3145.67,3760 3205.57,3819.9 3259.9,3819.9 ; v1(3260,4765) 3280,4785 v1(3605,4785) ; v1(3400,5315) C13.2@3400,5384.53 ; C9.2@3424.53,3965 3640.47,3965 C18.2@3730.47,3875 3730.47,3794.53 U18.32@3765,3760 3853.5,3671.5 R35.2@3915,3671.5 4050,3671.5 4156.5,3565 v1(4270,3565) ; v1(3725,1510) 4265,1510 v1(4365,1610) ; C7.2@3945,6555.47 3945,6455.11 ; v1(3990,6470) 3975.11,6455.11 3945,6455.11 ; v1(4050,4705) 4020,4735 4020,4985 R44.1@4335,5300 ; v1(4090,6052.5) 4052.03,6014.53 C40.2@3995,6014.53 3995,6135 4130,6270 U7.4@4130,6320 4077.9,6372.1 4028.01,6372.1 3945,6455.11 ; v1(4240,6052.5) 4245,6047.5 v1(4245,5870) 4250.5,5864.5 4445.03,5864.5 C22.2@4510,5799.53 ; v1(4365,1765) 4358.5,1771.5 R5.1@4358.5,2055 4358.5,2123.5 4382.9,2147.9 4525,2147.9 ; C6.2@4404.53,3880 4409.53,3875 v1(4485,3875) ; U1.30@4415,1165 4470,1165 4615,1310 4614.53,1310.47 C3.1@4614.53,1395 C4.2@4614.53,1490 4616.5,1491.97 R3.2@4616.5,1585 v1@4705,1585 ; C31.2@4445,2264.53 4504.53,2264.53 ; v1(4530,2745) 4508.5,2723.5 R15.1@4508.5,2605 4504.53,2601.02 4504.53,2264.53 ; v1(4630,6395) 4697.44,6327.56 PB7.1@4697.44,6304.69 4737.13,6265 5425,6265 5592.23,6432.23 5592.23,6612.23 5730,6750 5895,6750 ; v1(4705,1580) v1@4705,1585 ; v1(4725,3880) C10.2@4850.47,3880 ; C19.2@4835.47,3395 4835.47,3204.53 v1(4840,3200) ; C26.2@5315,5934.53 5315.47,5935 v1(5560,5935) ; C30.2@5505.47,2170 5420,2170 5400,2150 5275,2150 U3.34@5225,2100 4825,2100 U3.12@4725,2200 4687.9,2200 4672.9,2185 4672.9,2180.16 4644.84,2152.1 4640,2152.1 4635.8,2147.9 4525,2147.9 ; pad.0@5595,1350 5645,1350 ; R17.1@5886.5,1320 v1(5940,1320) 5940,1277 5900,1237 5778,1237 5655,1360 5655,1411.61 5421.61,1645 5235,1645 5208.5,1618.5 R24.1@5208.5,1570 5130,1570 5115,1585 v1@4705,1585 ; LCD1.2@5895,6695 5895,6750 ; v1(5940,2020) R19.1@5886.5,2020 R14.1@5886.5,2120 R16.1@5886.5,2220 6120,2453.5 6120,2907.64 6120,3385 6130,3395 v1(6120,3395) ; pad.39@6240,3530 pad.39@6340,3530 pad.39@6440,3530 pad.39@6540,3530 pad.39@6640,3530 pad.39@6740,3530 pad.39@6840,3530 pad.39@6940,3530 pad.39@7040,3530 pad.39@7140,3530 ; v1(6500,1965) C32.2@6805.47,1965 ; LCD1.15@7195,6695 7140,6750 5895,6750 ; R47.1@7630,3326.5 7714.3,3326.5 7790,3402.19 X2.4@7790,3455 ; 1348.5,4785 1435,4785 1515,4705 ; 4504.53,2264.53 4525,2244.06 4525,2147.9
  Bottom Layer w30: v1(1345,3225) 1345,3464 v1(1344,3465) 1600,3721 v1(1600,3730) 1484.5,3845.5 1484.5,3950.5 v1(1465,3970) ; v1(1355,4340) 1360,4335 v1(1360,4045) ; v1(1395,2645) 1395,2692.33 1587.67,2885 v1(1595,2885) 2138,2885 ; U26.3@1420,5185 1420,5565 v1(1810,5955) ; v1(1490,2100) 1565,2175 ; v1(1510,2235) 1565,2180 1565,2175 ; U1.1@1515,1165 1570,1110 4360,1110 U1.30@4415,1165 ; v1(1690,2255) 1645,2255 1565,2175 ; v1(1995,3785) 2020,3760 U14.1@2485,3760 U14.32@3085,3760 ; v1(2140,2815) 2138,2817 2138,2885 ; v1(2165,6160) 2165,6347.1 ; v1(2180.1,2980.1) 2180.1,2963.57 2138,2921.47 2138,2885 ; U16.16@2445,1915 2445,1697.39 2492.9,1649.49 2492.9,1567.1 2465,1539.2 v1(2465,1450) ; v1(2495,4675) 2555,4735 v1(2560,4735) ; v1(2755,4680) U9.9@2965,4680 3017,4732 3212,4732 3245,4765 v1(3260,4765) ; v1(2845,1785) v1(3000,1785) ; v1(2980,6290) 2950,6260 U27.20@2950,6140 2742.9,6347.1 2165,6347.1 ; v1(3400,5315) 3497.74,5315 3615,5197.74 3615,4795 v1(3605,4785) 3615,4775 3630,4775 3772.9,4632.1 3917.1,4632.1 U9.43@3965,4680 4025,4680 v1(4050,4705) ; v1(3460,1450) 3665,1450 v1(3725,1510) ; v1(4090,6052.5) v1(4240,6052.5) ; v1(4245,5870) 4245,5655.79 4381.52,5519.27 4381.52,5453.48 4335,5406.96 R44.1@4335,5300 4335,5235.8 4767.1,4803.7 4767.1,4408.09 4798.09,4377.1 5082.9,4377.1 v1(5240,4220) ; v1(4270,3565) 4343,3565 ; v1(4365,1610) v1(4365,1765) 4550,1580 v1(4705,1580) ; v1(4530,2745) v1(4530,2865) ; v1(4630,6395) 4627,6398 4113.82,6398 4041.82,6470 v1(3990,6470) 3983,6477 3983,6557 3837.57,6702.43 3217.43,6702.43 v1(3115,6600) 3110,6605 2226.47,6605 2094.47,6737 1842,6737 1645,6540 1502.26,6540 1472.1,6509.84 1472.1,6470.16 1521.27,6420.99 1995.97,6420.99 2069.86,6347.1 2165,6347.1 ; v1(4725,3880) 4688,3843 4550.53,3843 4518.53,3875 v1(4485,3875) 4483,3873 4483,3729.27 4343,3589.27 4343,3565 ; v1(4734.5,3095) 4735,3095 v1(4840,3200) 4522,3518 4370.53,3518 4343,3545.53 4343,3565 ; v1(5560,5935) 6435,5935 LCD1.15@7195,6695 ; v1(5940,1320) v1(5940,2020) 5973,1987 6174.47,1987 6196.47,1965 v1(6500,1965) ; v1(6120,3395) 6120,3410 pad.39@6240,3530 ; pad.39@7140,3530 7245,3635 7610,3635 X2.4@7790,3455
WR: U11.12 U14.31 U18.29 | length 3004.4
  Top Layer w10: U14.31@3085,3660 3085,3661.14 3216.76,3792.9 3657.1,3792.9 3720,3730 3720,3515 3765,3470 U18.29@3765,3460 4365.96,3460 4530,3624.04 v1(4530,3660) ; v1(5275,3960) 5375,3960 5405,3990 5405,4010 5389.72,4025.28 U11.12@5343.62,4025.28
  Bottom Layer w10: v1(4530,3660) 4537.67,3660 4574.67,3623 4605.33,3623 4677.33,3695 4874.04,3695 5134.04,3955 5270,3955 v1(5275,3960)
pads on no net: J1.21 J1.27 J1.31 J1.32 J1.34 J1.39 J2. J2.B J2.C J4.4 J4.5 J4.6 J4.A LCD1.0 MicroB. MicroB.2 MicroB.3 MicroB.4 PB1.3 PB1.4 PB2.3 PB2.4 PB3.3 PB3.4 PB4.3 PB4.4 PB5.3 PB5.4 PB6.3 PB6.4 RE1. RE2. RP1.1 RP1.4 RP1.13 RP1.16 RP5.6 RP5.7 RP5.8 RP5.9 RP5.10 RP5.11 U1. U1.18 U1.19 U1.24 U1.26 U6.1 U6.4 U6.5 U6.6 U6.8 U9.22 U9.23 U9.48 U9.51 U9.52 U9.53 U9.54 U9.58 U9.64 U10.12 U10.13 U10.14 U10.15 U17.7 U17.9 U17.12 U21.16 U21.17 U21.18 U21.19 U24.7 U24.14 U25.8 U25.11 U26.0

## Keep-outs
Keep-Out Layer:
  lines w10: 1000,1000 1000,6800 4900,6800 4900,6350 5400,6350 5400,6800 9300,6800 9300,1000 5400,1000 5400,1450 4900,1450 4900,1000 1000,1000 ; 1965,5505 1965,5805 2265,5805 2265,5505 1965,5505
Mechanical 1:
  lines w10: 1965,1995 2265,1995 2265,2295 1965,2295 1965,1995 ; 8035,1995 8035,2295 8335,2295 8335,1995 8035,1995 ; 8035,5505 8335,5505 8335,5805 8035,5805 8035,5505

## Silkscreen, mask and mechanical layers (free items; w line width, h text height)
Top Overlay:
  lines w10: 7190,2180 6190,2180 6190,2280 7190,2280 ; 7190,2180 7190,2280 ; 7190,2180 7390,2180 7390,2280 7190,2280 ; 7190,3480 6190,3480 6190,3580 7190,3580 ; 7190,3480 7190,3580 ; 7190,3480 7390,3480 7390,3580 7190,3580
  text "TRAP" at 4290,6635 h60
  text "RESET" at 4560,6635 h60
  text "1K" at 2010,6625 h30 r270
  text "GND" at 1710,6390 h60
  text "47uF" at 1550,6385 h30
  text "MAX6816" at 4040,6245 h30
  text "24MHz" at 2555,6235 h60
  text "GAL16V8" at 3700,6215 h30
  text "CS" at 5105,6190 h40 r90
  text "RW" at 5205,6190 h40 r90
  text "E" at 5305,6190 h40 r90
  text "150R" at 2360,6160 h30
  text "3.3V" at 1815,6085 h60
  text "10uF" at 1715,6020 h30
  text "DISP" at 5115,6015 h40
  text "LM1086" at 1125,6005 h30
  text "5V" at 1925,5970 h60
  text "150R" at 2360,5930 h30
  text "10uF" at 1715,5815 h30
  text "POT_CS" at 3595,5685 h40
  text "UD" at 4065,5685 h40
  text "MCP4013" at 4270,5645 h30
  text "SRDY" at 3515,5590 h40
  text "PLD_SRDY" at 3515,5485 h40
  text "200R" at 1680,5350 h30 r90
  text "121R" at 1785,5350 h30 r90
  text "10K" at 4255,5155 h30
  text "74ALS245" at 1990,5110 h30 r270
  text "MAX6818" at 2235,4760 h30
  text "74ALS245" at 1965,4485 h30 r270
  text "74ALS245" at 2195,4260 h30
  text "74ALS573" at 1965,4100 h30 r270
  text "MAX709" at 4245,4080 h30
  text "80C188XL" at 2915,4070 h30
  text "1K" at 4575,4015 h30
  text "74HCT244" at 5125,3900 h30
  text "GND" at 1280,3705 h60
  text "Tim Menninger" at 8465,3630 h60
  text "VCC" at 6195,3605 h60
  text "V3.3" at 7190,3605 h60
  text "Jukebox 03/2016" at 8325,3530 h60
  text "74ALS573" at 4695,3505 h30
  text "24.576MHz" at 7690,3505 h60
  text "Revision 2.0" at 8525,3430 h60
  text "74FCT162646" at 1555,3425 h30
  text "MAX6818" at 4720,3030 h30
  text "XCS" at 7605,2980 h40
  text "CLK" at 7605,2880 h40
  text "XDCS" at 7605,2780 h40
  text "D0" at 3167,2775 h40
  text "74LCX125" at 8370,2685 h30
  text "74LCX125" at 8840,2685 h30
  text "A0" at 3167,2680 h40
  text "ISPLSI1016E" at 5070,2575 h30
  text "0K" at 7915,2475 h30
  text "AM28F020-200PC" at 2435,2160 h30
  text "HM628128B" at 3420,2155 h30
  text "AGND" at 7190,2100 h60
  text "GND" at 6190,2095 h60
  text "DIOR" at 5655,1980 h40 r270
  text "100K" at 8025,1935 h30
  text "RAS" at 4350,1915 h40 r90
  text "CAS" at 4400,1915 h40 r90
  text "DIOW" at 5485,1845 h40 r270
  text "WE" at 4350,1825 h40 r90
  text "CS0" at 4400,1785 h40 r90
  text "100K" at 8020,1725 h30
  text "MUX" at 4350,1695 h40 r90
  text "74LS158" at 2385,1670 h30 r90
  text "74LS158" at 3335,1670 h30 r90
  text "74LS158" at 1440,1665 h30 r90
  text "10nF" at 8030,1575 h30
  text "20R" at 8345,1575 h30
  text "50uF" at 9165,1550 h30
  text "10nF" at 1535,1480 h30
  text "10nF" at 4415,1470 h30
  text "20R" at 8345,1390 h30
  text "10nF" at 8030,1385 h30
  text "1uF" at 1535,1380 h30
  text "1uF" at 4440,1375 h30
  text "256K x 8" at 1055,1330 h30
  text "VS1011E" at 7005,1245 h30
  text "VCC" at 5525,1235 h60
  text "100nF" at 6815,1230 h30
  text "10nF" at 8030,1205 h30
  text "20R" at 8345,1200 h30
  text "GND" at 6015,1135 h60
  text "V3.3" at 8490,1120 h60
  text "AGND" at 8065,1040 h60
Mechanical 1:
  lines w10: 1000,800 1000,850 ; 1000,6900 1000,6950 ; 1000,7205 1000,7275 ; 1066.87,802.71 1000,825 ; 1066.87,847.29 1000,825 ; 1066.87,6902.71 1000,6925 ; 1066.87,6947.29 1000,6925 ; 1066.87,7217.71 1000,7240 ; 1066.87,7262.29 1000,7240 ; 2556.61,825 1000,825 ; 2556.61,6925 1000,6925 ; 3278.39,825 4900,825 ; 3278.39,6925 4900,6925 ; 4833.13,802.71 4900,825 ; 4833.13,847.29 4900,825 ; 4833.13,6902.71 4900,6925 ; 4833.13,6947.29 4900,6925 ; 4870,7240 1000,7240 ; 4900,680 4900,880 ; 4900,6880 4900,7060 ; 4966.87,712.71 4900,735 ; 4966.87,757.29 4900,735 ; 4966.87,6992.71 4900,7015 ; 4966.87,7037.29 4900,7015 ; 5115,1000 5185,1000 ; 5115,6800 5185,6800 ; 5125,1450 5175,1450 ; 5127.71,1066.87 5150,1000 5172.29,1066.87 ; 5127.71,1383.13 5150,1450 ; 5127.71,6733.13 5150,6800 ; 5150,1003.4 5150,1450 ; 5150,6350 5150,6800 ; 5172.29,1383.13 5150,1450 ; 5172.29,6733.13 5150,6800 ; 5333.13,712.71 5400,735 ; 5333.13,757.29 5400,735 ; 5333.13,6992.71 5400,7015 ; 5333.13,7037.29 5400,7015 ; 5400,710 5400,760 ; 5400,6990 5400,7040 ; 5570,7240 9300,7240 ; 9233.13,7217.71 9300,7240 ; 9233.13,7262.29 9300,7240 ; 9300,7205 9300,7275 ; 9400,1000 9490,1000 ; 9400,6800 9490,6800 ; 9417.71,1066.87 9445,1000 ; 9417.71,6733.13 9445,6800 ; 9445,3451.61 9445,1000 ; 9445,4153.39 9445,6800 ; 9472.29,1066.87 9445,1000 ; 9472.29,6733.13 9445,6800 ; 4900,735 5400,735 ; 4900,7015 5400,7015
  text "8300mil" at 4911.61,7206.56 h100
  text "500mil" at 4991.6,7056.56 h60
  text "3900mil" at 2611.61,6891.56 h100
  text "5800mil" at 9411.56,4113.39 h100 r270
  text "450mil" at 5031.56,1383.4 h60 r270
  text "3900mil" at 2611.61,791.56 h100
  text "500mil" at 4991.6,776.56 h60
Mechanical 4:
  lines w30: 985,1195 985,985 1195,985 ; 985,6605 985,6815 1195,6815 ; 9105,985 9315,985 9315,1195

## Text inside footprints (layer, text, board x,y; h text height)
C0: Top Overlay "+" at 1560,6660 h70 r90
C44: Top Overlay "+" at 9200,1610 h70
C45: Top Overlay "+" at 8900,1610 h70